# Altium PCB 1fach_Nutzen.PcbDoc
Units mm, origin at the board's own origin, x right, y up, seen from the top; angles counter-clockwise.
Board outline 150.5 x 85 mm, 6 copper layers (L1, L2(GND), L3, L4(PWR), L5(GND), L6), stack 1.565 mm thick; 6 components, 0 nets, 54 pads, 0 vias.
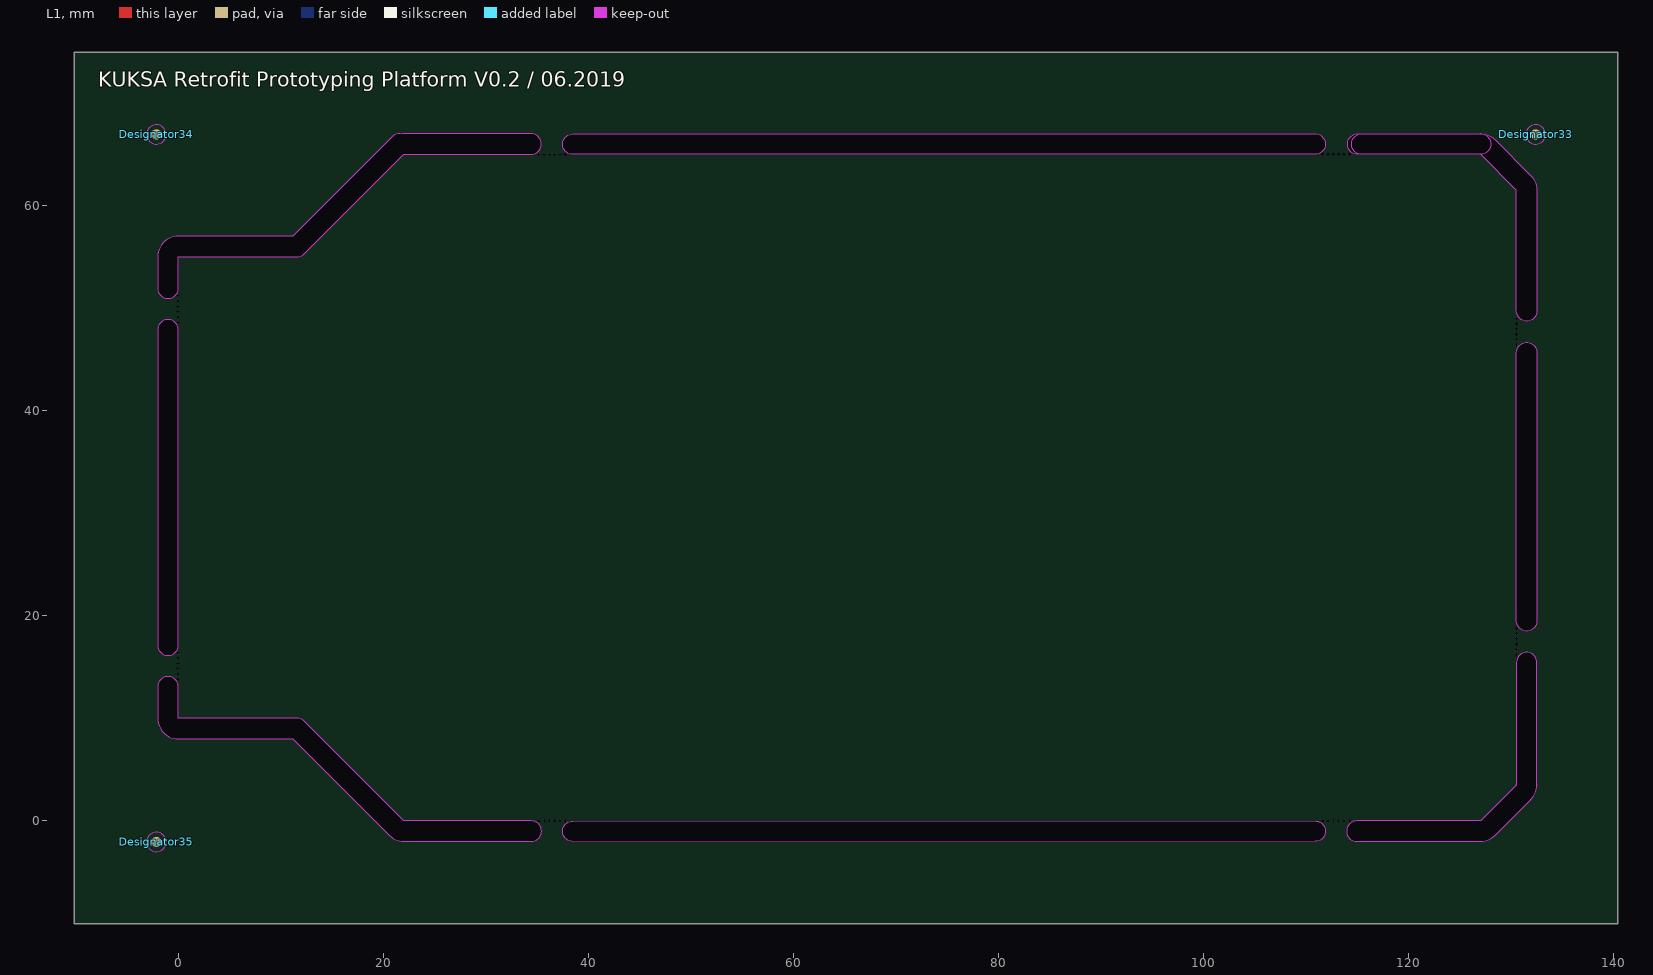
[diagram p0: L1 view]
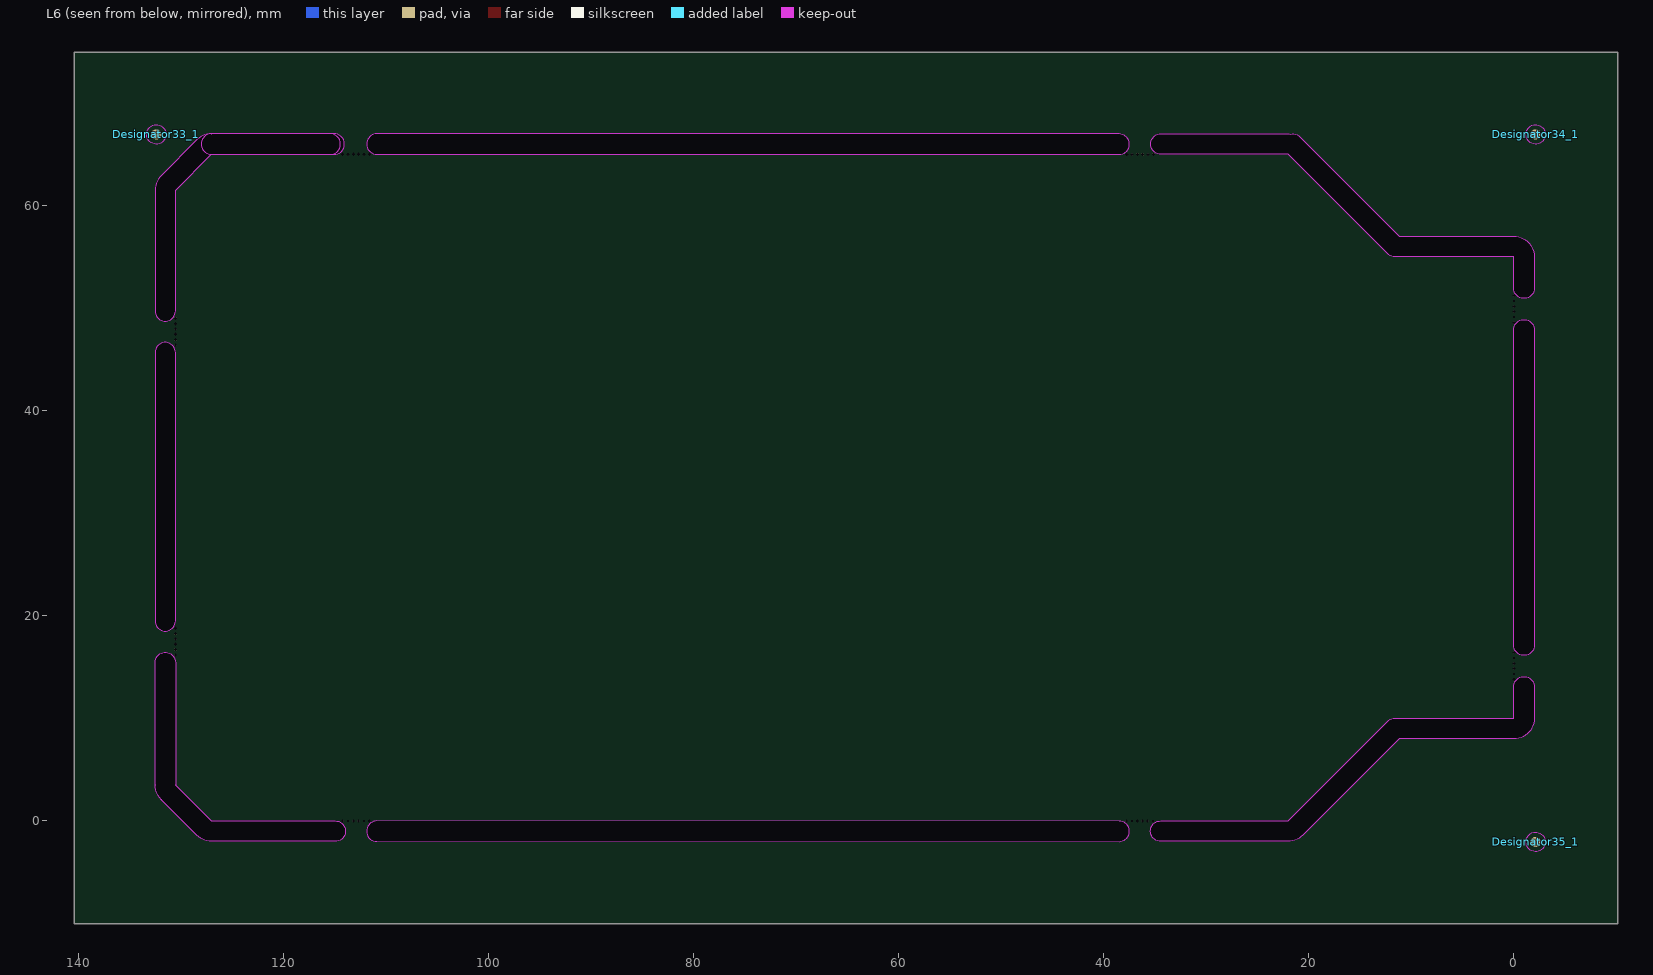
[diagram p1: L6 view, seen from below]
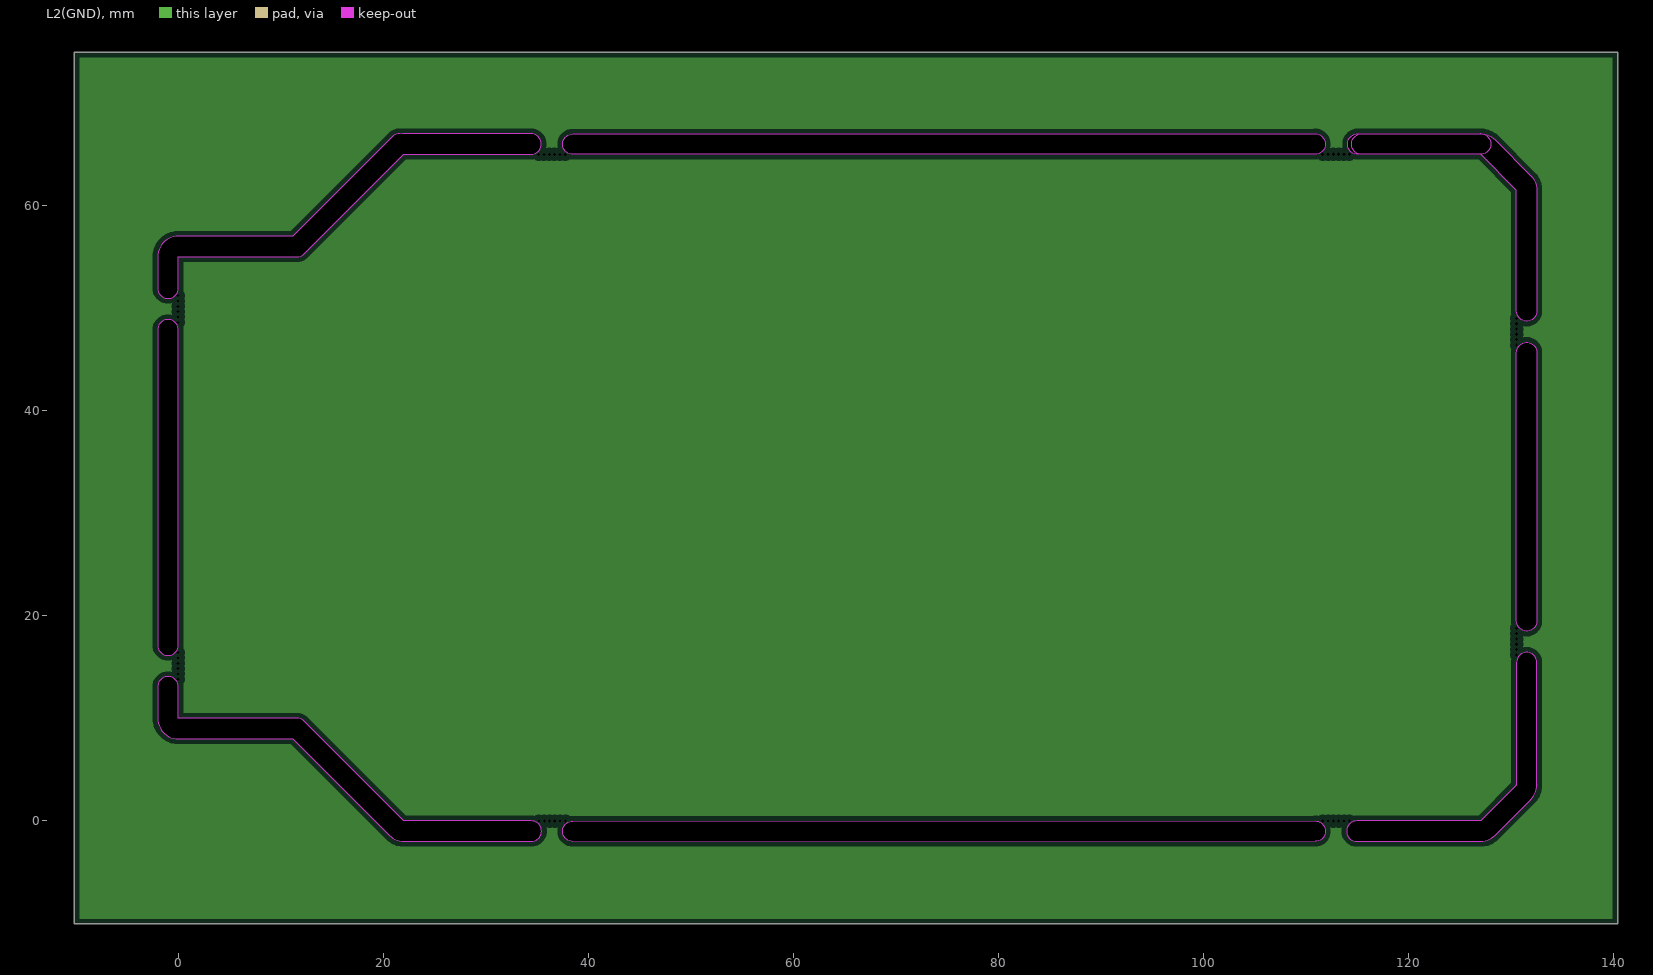
[diagram p2: L2(GND), clearances drawn from the general rule]
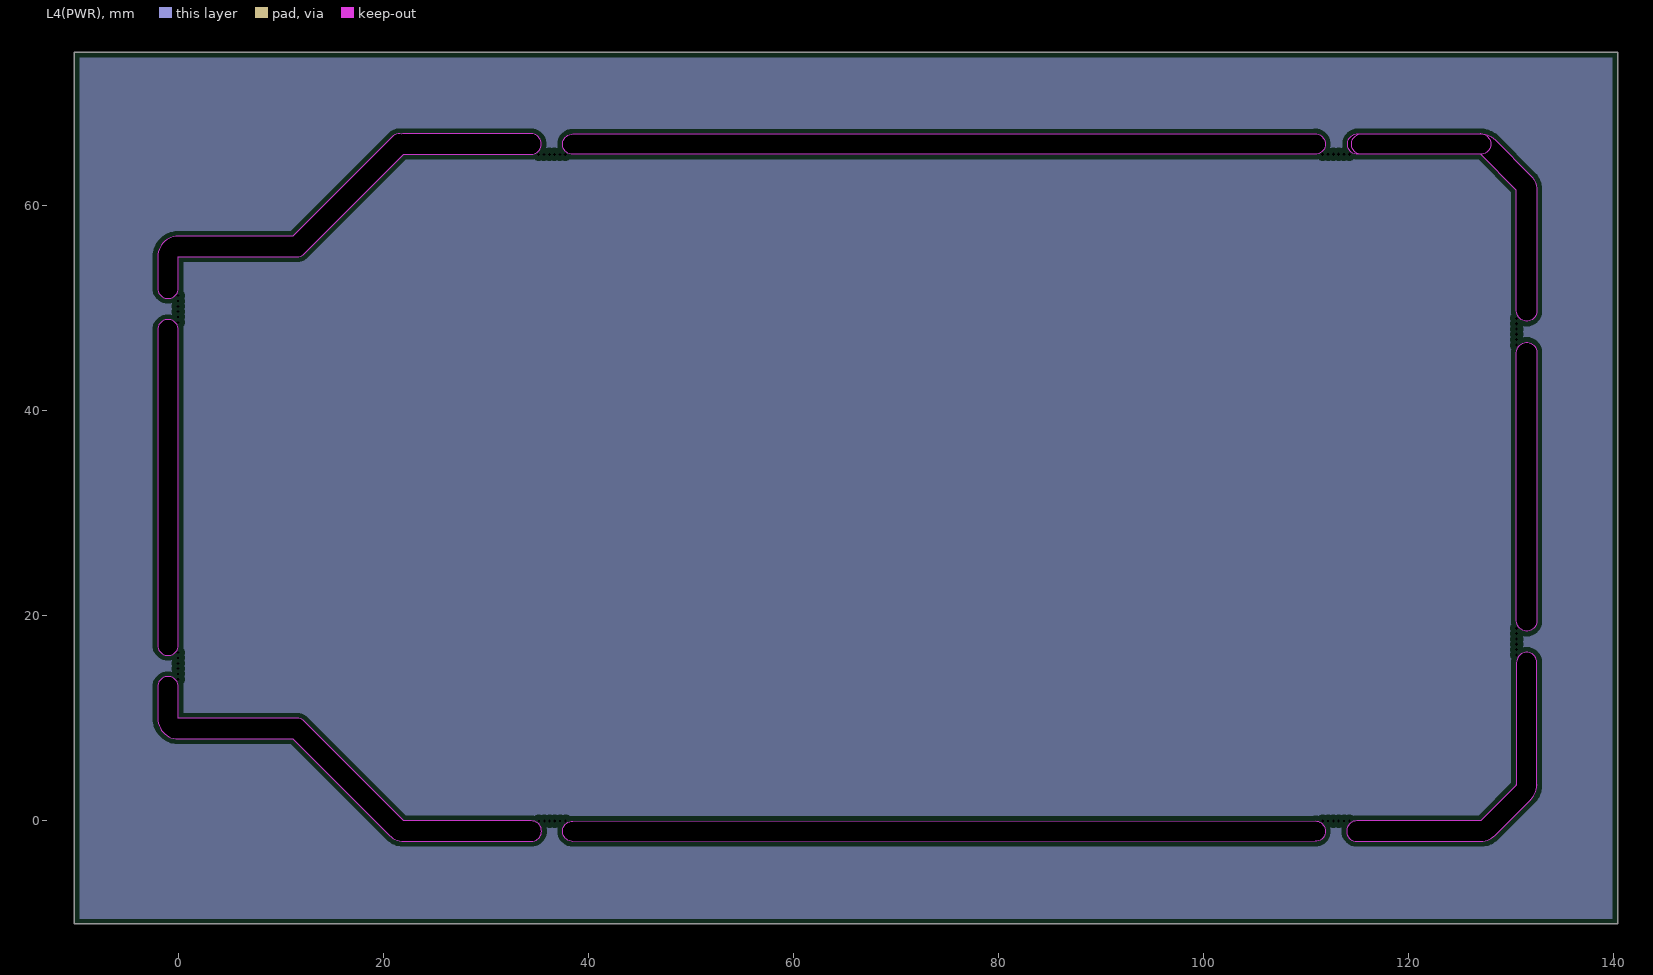
[diagram p3: L4(PWR), clearances drawn from the general rule]
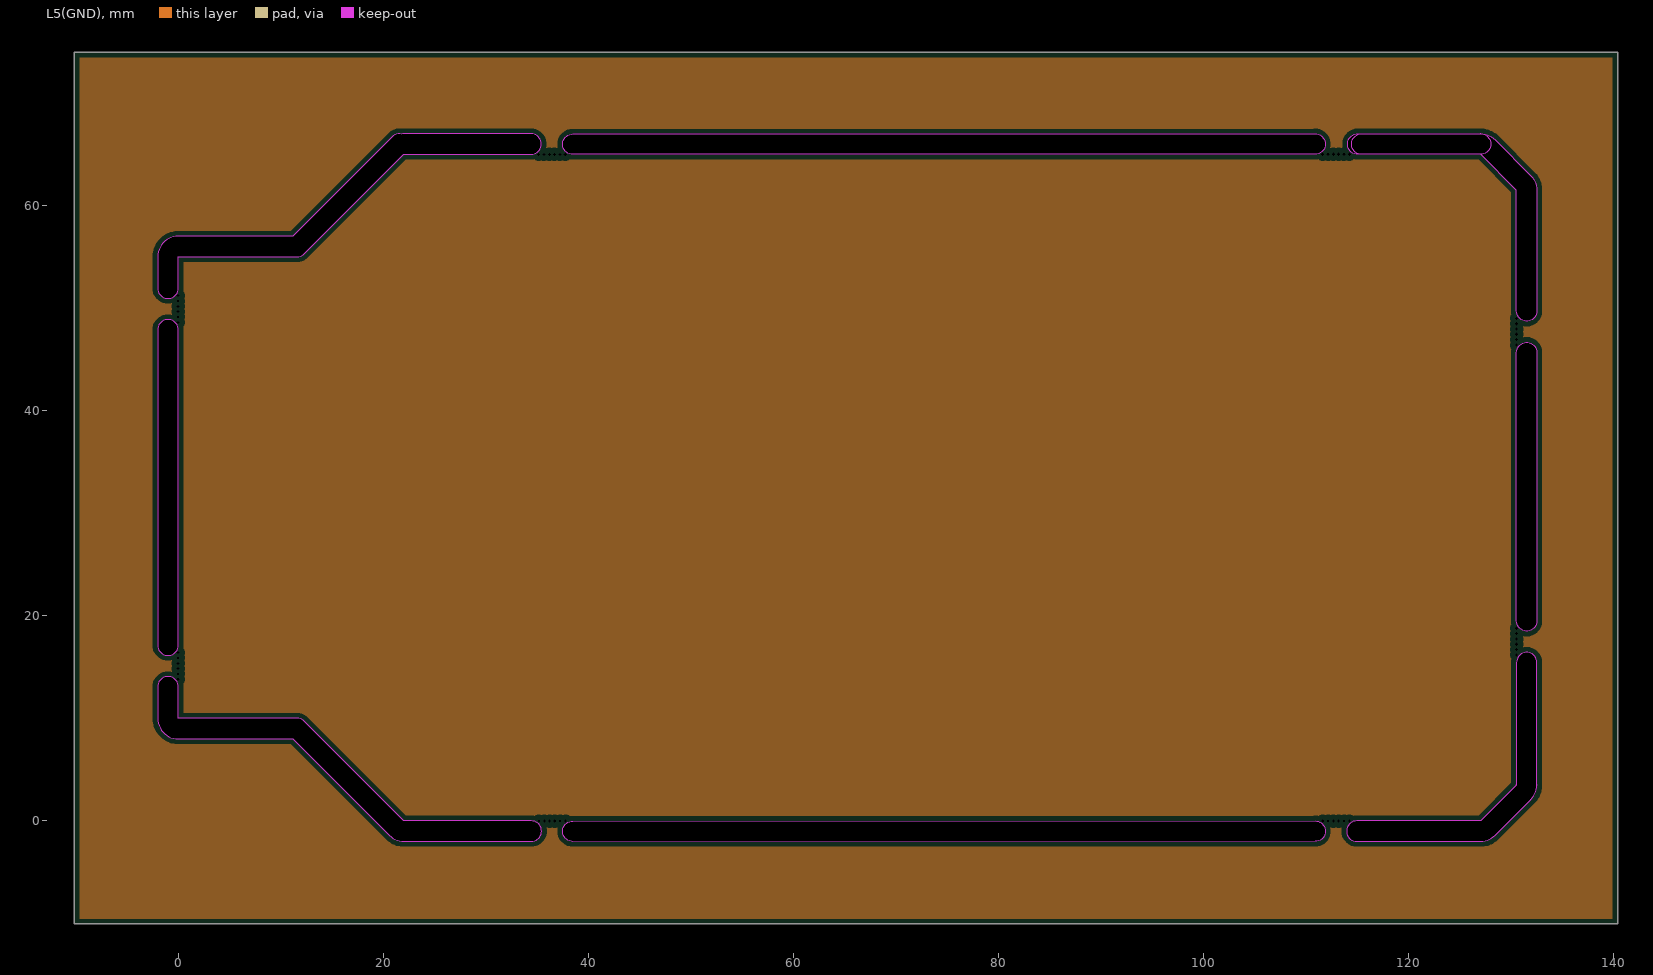
[diagram p4: L5(GND), clearances drawn from the general rule]

## Layer stack, top to bottom
Top Solder: solder mask 0.0102, Solder Resist, Dk 3.5
L1: signal copper 0.035
Dielectric 1: prepreg 0.185, Dk 4.2
L2(GND): plane copper 0.035
Dielectric 2: core 0.4, FR4, Dk 4.2
L3: signal copper 0.035
Dielectric 3: prepreg 0.185, Dk 4.2
L4(PWR): plane copper 0.035
Dielectric 4: core 0.4, FR4, Dk 4.2
L5(GND): plane copper 0.035
Dielectric 5: prepreg 0.185, Dk 4.2
L6: signal copper 0.035
Bottom Solder: solder mask 0.0102, Solder Resist, Dk 3.5

## Board outline
-10.132,-10.053 140.368,-10.053 140.368,74.947 -10.132,74.947
cut-out: 115.026,65 cw(c115.026,66) 115.026,67 126.998,67 cw(c126.998,66) 127.998,66 cw(c126.998,66) 126.998,65
cut-out: 0,8 11.171,8 20.586,-1.414 20.586,-1.415 ccw(c22,0) 22,-2 34.433,-2 ccw(c34.433,-1) 35.434,-1 ccw(c34.433,-1) 34.433,0 22,0 ccw(c21.29,-0.705) 21.998,0.003 22,0 12.293,9.707 ccw(c11.586,9) 11.586,10 0,10 0,13.072 ccw(c-1,13.072) -2,13.072 -2,10 ccw(c0,10)
cut-out: 20.583,-1.412 ccw(c21.293,-0.707) 20.584,-1.413 ccw(c21.29,-0.705) 20.586,-1.414 cw(c21.293,-0.707) 20.584,-1.413 cw(c21.29,-0.705)
cut-out: 20.583,-1.412 ccw(c21.293,-0.707) 20.584,-1.413 ccw(c21.29,-0.705) 20.586,-1.414 cw(c21.293,-0.707) 20.584,-1.413 cw(c21.29,-0.705)
cut-out: 20.583,-1.412 ccw(c21.293,-0.707) 20.584,-1.413 ccw(c21.29,-0.705) 20.586,-1.414 cw(c21.293,-0.707) 20.584,-1.413 cw(c21.29,-0.705)
cut-out: -2,17.136 ccw(c-1,17.136) 0,17.136 0,47.884 ccw(c-1,47.884) -2,47.884
cut-out: -2,51.948 ccw(c-1,51.948) 0,51.948 0,55.019 11.586,55.019 ccw(c11.586,56.019) 12.293,55.312 21.981,65 34.412,65 ccw(c34.412,66) 35.412,66 ccw(c34.412,66) 34.412,67 21.979,67 ccw(c21.979,66) 21.773,66.979 ccw(c21.567,66) 20.859,66.707 11.171,57.02 0,57.02 ccw(c0,55.019) -2,55.021 ccw(c-1,55.02) -2,55.02
cut-out: 126.996,65 ccw(c126.996,66) 126.998,65 ccw(c126.996,66) 127,65 cw(c126.998,66) 126.999,65 ccw(c127,66) 127,65 115.412,65 cw(c115.412,66) 115.412,67 127,67 ccw(c127,66) 126.999,67 cw(c126.998,66) 127,67 ccw(c127,65) 126.996,67 ccw(c127,65) 126.994,67 ccw(c127,65) 126.992,67 cw(c126.996,66) 126.996,67 cw(c127,66) 126.999,67 ccw(c126.998,66) 126.998,67 127,67 cw(c127,65) 128.414,66.415 131.914,62.915 ccw(c130.5,61.5) 131.913,62.916 cw(c131.206,62.209) 131.914,62.915 cw(c131.206,62.209) 131.914,62.915 cw(c130.5,61.5) 132.5,61.5 cw(c131.5,61.5) 132.5,61.497 132.5,61.498 ccw(c131.5,61.498) 132.5,61.499 132.5,49.731 cw(c131.5,49.731) 130.5,49.731 130.5,61.498 cw(c131.5,61.498) 130.5,61.499 cw(c131.5,61.498) 130.5,61.5 ccw(c131.5,61.5) 130.5,61.498 130.5,61.5 127,65 ccw(c127.707,65.707) 127.002,64.997 126.999,65 cw(c127,66) 126.998,65 cw(c127,66)
cut-out: 130.5,19.505 130.5,45.667 cw(c131.5,45.667) 132.5,45.667 132.5,19.505 cw(c131.5,19.505)
cut-out: 114.93,-2 127.002,-2 ccw(c127.002,-1) 127.004,-2 ccw(c127.002,-1) 127.01,-2 cw(c127,0) 127.002,-2 127.004,-2 ccw(c127,0) 128.415,-1.415 ccw(c127,0) 128.417,-1.412 ccw(c127,0) 128.418,-1.411 ccw(c127,0) 128.419,-1.41 128.417,-1.412 cw(c127.71,-0.705) 128.416,-1.413 ccw(c127.707,-0.707) 128.417,-1.412 128.416,-1.413 cw(c127.71,-0.705) 128.415,-1.414 131.915,2.086 ccw(c131.207,2.793) 131.918,2.089 131.915,2.086 ccw(c130.5,3.5) 132.5,3.5 ccw(c131.5,3.5) 132.5,3.504 ccw(c131.5,3.504) 132.5,3.508 cw(c130.5,3.5) 132.5,3.506 cw(c130.5,3.5) 132.5,3.504 cw(c130.5,3.5) 132.5,3.5 cw(c131.5,3.5) 132.5,3.494 132.5,3.5 132.5,15.441 ccw(c131.5,15.441) 130.5,15.441 130.5,3.5 ccw(c131.207,2.793) 130.497,3.498 130.5,3.5 cw(c131.5,3.502) 130.5,3.501 cw(c131.5,3.502) 130.5,3.502 ccw(c131.5,3.504) 130.5,3.5 cw(c131.5,3.5) 130.5,3.502 cw(c131.5,3.5) 130.5,3.504 ccw(c131.5,3.504) 130.5,3.502 130.5,3.5 127,0 cw(c127.707,-0.707) 127.001,0.001 cw(c127.707,-0.707) 127.002,0.003 ccw(c127.71,-0.705) 127.001,0.001 ccw(c127.71,-0.705) 127,0 ccw(c127,-1) 126.996,0 114.93,0 ccw(c114.93,-1)
cut-out: 38.48,-2.013 cw(c38.48,-1.013) 38.48,-0.013 110.87,0 cw(c110.87,-1) 111.87,-1 cw(c110.87,-1) 110.87,-2
cut-out: 38.476,64.987 cw(c38.476,65.987) 38.476,66.987 110.866,67 cw(c110.866,66) 111.866,66 cw(c110.866,66) 110.866,65

## Design rules (kind name [scope] priority, off if disabled: settings)
Clearance [All] p1: gap=0.254 ignorepadtopadclearanceinfootprint=FALSE except(0: Arc-Hole Track-Hole SMDPad-Hole THPad-Hole Via-Hole Fill-Hole Poly-Hole Region-Hole Text-Hole)
PlaneClearance [All] p1: clearance=0.508
PlaneConnect [All] p1: planeconnectstyle=Relief reliefexpansion=0.508 reliefentries=4 reliefconductorwidth=0.254 reliefairgap=0.254
PolygonConnect [All] p1: connectstyle=Relief reliefconductorwidth=0.254 reliefentries=4 polygonreliefangle="90 Angle" airgapwidth=0.254
RoutingVias [All] p1: holewidth=0.711 width=1.27 viastyle="Through Hole" minholewidth=0.711 minwidth=1.27 maxholewidth=0.711 maxwidth=1.27
SolderMaskExpansion [All] p1: expansion=0.102
Width [All] p1: maxlimit=0.254 minlimit=0.254 preferedwidth=0.254
28 further rules are at their usual default settings.

## Components (designator, comment, footprint, x,y, rotation, side; value= is the part's Value field where it differs from the comment)
Designator33 "Comment" "Fiducial Marker" 132.368,66.947 r0 top
Designator33_1 "Comment" "Fiducial Marker" 132.368,66.947 r180 bottom
Designator34 "Comment" "Fiducial Marker" -2.132,66.947 r90 top
Designator34_1 "Comment" "Fiducial Marker" -2.132,66.947 r90 bottom
Designator35 "Comment" "Fiducial Marker" -2.132,-2.053 r180 top
Designator35_1 "Comment" "Fiducial Marker" -2.132,-2.053 r0 bottom

## Footprints (in the part's own frame and the unit in brackets; to place one, negate y for a bottom-side part, rotate by r counter-clockwise, add the part's x,y. Pads: shape width x height; smd on the part's side, far side on the other; paste and mask are expansions set on the pad)
"Fiducial Marker" [mm] "Passermarke / Fiducial Marker / Kamera-Marke 1.0mm Durchmesser , 500µm Lackfreistellung"
  round 1 smd paste-2 mask+0.5: 1(0,0)
  L1 keep-out circle w0.1: c0,0 r0.95

## Free pads (board coordinates)
  round 0.2 hole 0.3 unplated: 0(-0.013,15.358) 0(-0.013,50.17) 0(36.19,65) 0(36.719,-0.013) 0(113.152,65.013) 0(113.156,-0.013) 0(130.513,47.953) 0(130.513,17.727) 1(-0.013,16.415) 1(-0.013,51.227) 1(35.133,65) 1(37.776,-0.013) 1(114.209,65.013) 1(114.213,-0.013) 1(130.513,49.01) 1(130.513,18.784) 2(-0.013,15.886) 2(-0.013,50.699) 2(35.662,65) 2(37.248,-0.013) 2(113.68,65.013) 2(113.684,-0.013) 2(130.513,48.481) 2(130.513,18.255) 3(-0.013,14.859) 3(-0.013,49.671) 3(36.22,-0.013) 3(36.689,65) 3(112.653,65.013) 3(112.657,-0.013) 3(130.513,47.454) 3(130.513,17.228) 4(-0.013,13.81) 4(-0.013,48.622) 4(-0.013,14.334) 4(-0.013,49.147) 4(35.171,-0.013) 4(35.695,-0.013) 4(37.214,65) 4(37.738,65) 4(111.604,65.013) 4(111.608,-0.013) 4(112.128,65.013) 4(112.132,-0.013) 4(130.513,46.929) 4(130.513,16.703) 4(130.513,46.405) 4(130.513,16.179)

## Nets (pads, with @x,y where several pads share a name; then routed paths per layer and width w, separated by ;. In a path a pad name is that pad's centre, name@x,y a point inside that pad or via, vN(x,y) a via of type N, cw(c..) or ccw(c..) an arc to the next point about the centre after c; other vN are vias at no path point)
pads on no net: Designator33.1 Designator33_1.1 Designator34.1 Designator34_1.1 Designator35.1 Designator35_1.1

## Polygon pours and split planes (outlines as drawn)
no net on L2(GND) (split plane): 139.858,-9.543 -9.622,-9.543 -9.622,74.437 139.858,74.437
no net on L4(PWR) (split plane): 139.858,-9.543 -9.622,-9.543 -9.622,74.437 139.858,74.437
no net on L5(GND) (split plane): 139.858,-9.543 -9.622,-9.543 -9.622,74.437 139.858,74.437

## Silkscreen, mask and mechanical layers (free items; w line width, h text height)
Top Overlay:
  text "KUKSA Retrofit Prototyping Platform V0.2 / 06.2019" at -7.823,71.095 h2.5
Mechanical 1:
  lines w0.25: -10.132,-10.053 21.868,-10.053 140.368,-10.053 140.368,74.947 -10.132,74.947 -10.132,-10.053
  lines w2: -1,13.072 -1,10 ccw(c0,10) 0,9 11.586,9 21.29,-0.705 ; -1,17.136 -1,47.884 ; -1,51.948 -1,55.02 ; 21.293,-0.707 21.29,-0.705 ; 21.567,66 11.586,56.019 0,56.019 ; 21.979,66 34.412,66 ; 34.433,-1 22,-1 cw(c22,0) 21.29,-0.705 ; 38.476,65.987 110.866,66 ; 38.48,-1.013 110.87,-1 ; 114.93,-1 127.002,-1 ; 115.026,66 126.998,66 ; 131.5,3.502 131.5,15.441 ; 131.5,19.505 131.5,45.667 ; 131.5,49.731 131.5,61.498 ; 0,56.019 ccw(c0,55.019) -1,55.019 cw(c0,55.019) 0,56.019 ; 126.996,66 cw(c127,65) 127.707,65.707 ; 126.996,66 cw(c127,65) 127.707,65.707 ; 126.996,66 127,66 cw(c127,65) 127.707,65.707 ; 127,-1 ccw(c127,0) 127.707,-0.707 127.71,-0.705 ; 127,-1 ccw(c127,0) 127.71,-0.705 ; 127,-1 ccw(c127,0) 127.71,-0.705 ; 127.707,65.707 131.206,62.209 ; 127.71,-0.705 131.207,2.793 ; 131.206,62.209 cw(c130.5,61.5) 131.5,61.5 ; 131.206,62.209 cw(c130.5,61.5) 131.5,61.5 ; 131.206,62.209 131.207,62.207 cw(c130.5,61.5) 131.5,61.5 ; 131.207,2.793 ccw(c130.5,3.5) 131.5,3.5 ; 131.207,2.793 ccw(c130.5,3.5) 131.5,3.5 ; 131.207,2.793 ccw(c130.5,3.5) 131.5,3.5 ; 131.5,3.5 ccw(c130.5,3.5) 131.5,3.504 ; 131.5,3.5 ccw(c130.5,3.5) 131.5,3.504 ; 131.5,3.5 131.5,3.504 ; 21.274,65.707 cw(c21.981,65) 21.981,66 ccw(c21.981,65) 21.274,65.707

## Panel: embedded boards
"AEX1_PiOBD_V0.2_ALLPCB_6L.PcbDoc" at 0,0, 1 rows x 1 columns, spacing 63.5 x 38.1, rotation 0